# EAGLE board Output Power Distro (EAGLE 9.4.2)
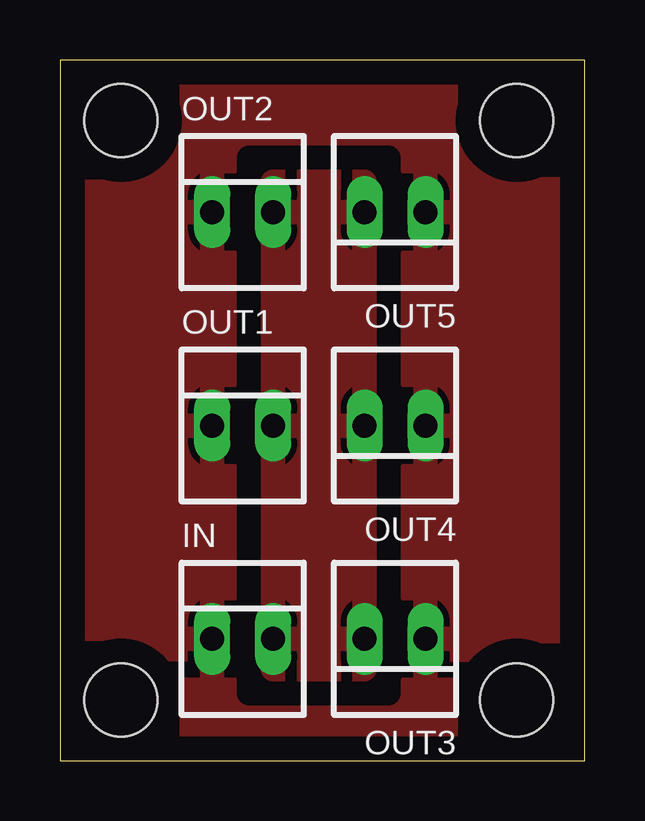
[diagram p0: board, top side]
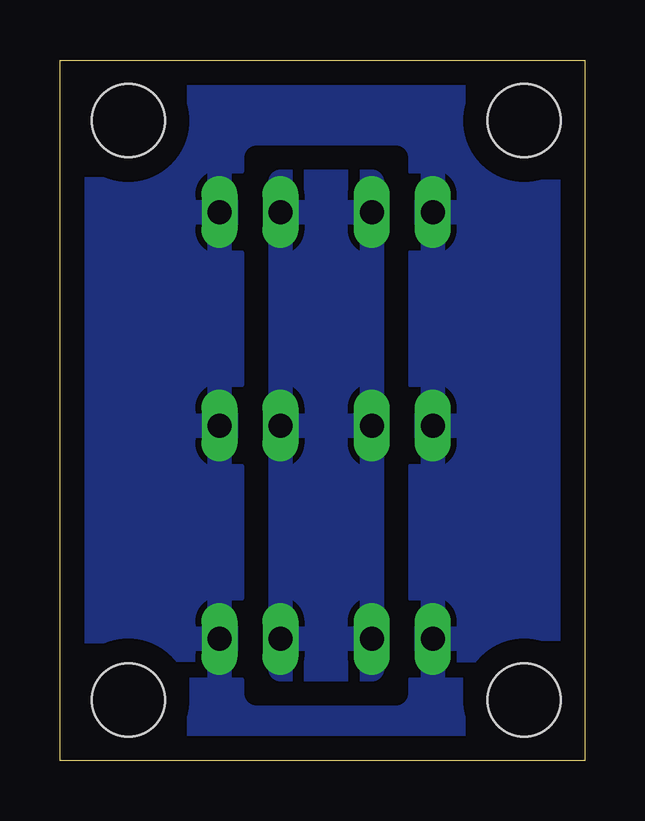
[diagram p1: board, bottom side, seen from below]

Size 21.89 x 29.2 mm. Coordinates in mm from the lower left corner, seen from the top.
Outline: 0,0 21.89,0 21.89,29.2 0,29.2 0,0
Copper layers (1*16): Top 0.035559375mm / dielectric 1.6mm / Bottom 0.035559375mm
Design rules "default": minimum track width 6mil, minimum drill 10mil, track to track 6mil, track to pad 6mil, pad to pad 6mil, via to via 6mil, smd to smd 6mil, copper to edge 15mil, drill to drill 6mil, minimum pad ring 5mil, minimum via ring 5mil, stop-mask expansion 2.5mil, vias tented up to drill 0mil, thermal gap 10mil
Holes 3.05 mm at 2.54,2.54 2.54,26.67 19.05,2.54 19.05,26.67

## Footprints (pad centres in the part's own frame; a part is rotated, then mirrored left to right if it is on the bottom)
22-23-2021 = drill 1 long: 1 -1.27,0; 2 1.27,0

## Placement (x,y rotation side)
IN  22-23-2021  [22-23-2021]  7.62,5.08 0 top
OUT1  22-23-2021  [22-23-2021]  7.62,13.97 0 top
OUT2  22-23-2021  [22-23-2021]  7.62,22.86 0 top
OUT3  22-23-2021  [22-23-2021]  13.97,5.08 180 top
OUT4  22-23-2021  [22-23-2021]  13.97,13.97 180 top
OUT5  22-23-2021  [22-23-2021]  13.97,22.86 180 top

## Library data of the parts
IN OUT1-OUT5 = con-molex; MF: MOLEX; MPN: 22-23-2021; OC_FARNELL: 1462926; OC_NEWARK: 25C3832

## Nets
GND: IN.1 OUT1.1 OUT2.1 OUT3.1 OUT4.1 OUT5.1
VCC: IN.2 OUT1.2 OUT2.2 OUT3.2 OUT4.2 OUT5.2

## Tracks (layer width: path | path; a pad name or v marks a point on that pad's centre or on a via)
GND
  pour Top (isolate 1.016, rank 2): 0,29.21 22.23,29.21 22.23,0 0,0
  pour Bottom (isolate 1.016, rank 2): 0,29.21 22.23,29.21 22.23,12.06 23.5,10.79 23.5,0 0,0
VCC
  pour Top (isolate 1.016): 8.89,3.81 12.7,3.81 12.7,24.13 8.89,24.13
  pour Bottom (isolate 1.016): 8.89,24.13 12.7,24.13 12.7,3.81 8.89,3.81